# EAGLE board OpenBlink (EAGLE 6.3)
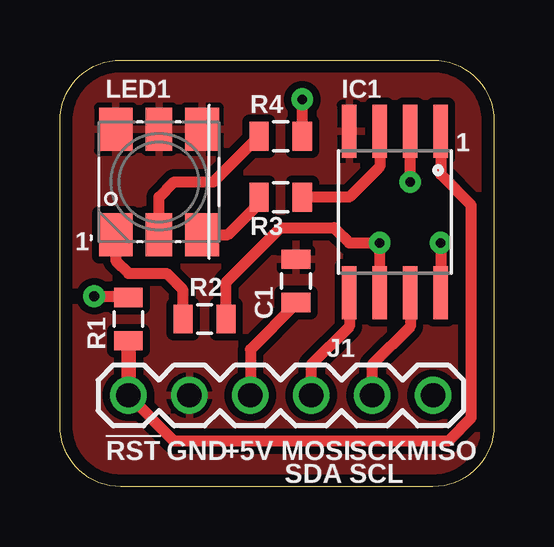
[diagram p0: board, top side]
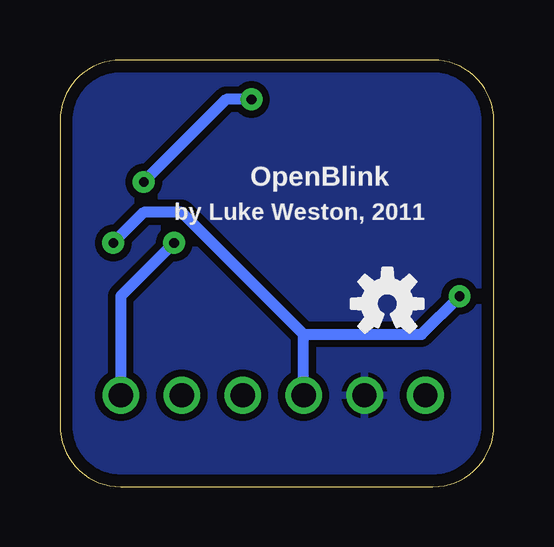
[diagram p1: board, bottom side, seen from below]

Size 18.1 x 17.78 mm. Coordinates in mm from the lower left corner, seen from the top.
Outline: 2.54,0 arc-90 0,2.54 0,15.24 arc-90 2.54,17.78 15.56,17.78 arc-90 18.1,15.24 18.1,2.54 arc-90 15.56,0 2.54,0
Copper layers (1*16): Top 0.035mm / dielectric 1.5mm / Bottom 0.035mm
Design rules "PCBCart-Standard *": minimum track width 8mil, minimum drill 0.4mm, track to track 8mil, track to pad 8mil, pad to pad 8mil, via to via 8mil, smd to smd 8mil, copper to edge 20mil, drill to drill 8mil, minimum pad ring 8mil, minimum via ring 10mil, stop-mask expansion 3mil, vias tented up to drill 16mil, thermal gap 8mil

## Footprints (pad centres in the part's own frame; a part is rotated, then mirrored left to right if it is on the bottom)
0805 = smd 0.8 x 1.2: 1 -0.9,0; 2 0.9,0
SO08-EIAJ = smd 0.61 x 2.21: 1 -1.905,-3.378; 2 -0.635,-3.378; 3 0.635,-3.378; 4 1.905,-3.378; 5 1.905,3.353; 6 0.635,3.353; 7 -0.635,3.353; 8 -1.905,3.353
1X06 = drill 1.016: 1 0,0; 2 2.54,0; 3 5.08,0; 4 7.62,0; 5 10.16,0; 6 12.7,0
LED-RGB-5050 = smd 1.8 x 1.4: BA -2.2,1.8; BK 2.2,1.8; GA -2.2,-1.8; GK 2.2,-1.8 | smd 1.8 x 1.1: RA -2.2,0; RK 2.2,0

## Placement (x,y rotation side)
C1  100nF  [0805]  9.84,8.57 90 top
IC1  ATtiny85  [SO08-EIAJ]  13.97,11.43 180 top
J1  Interface  [1X06]  2.86,3.81 0 top
LED1  RGB LED  [LED-RGB-5050]  4.13,12.7 90 top
R1  10kΩ  [0805]  2.86,6.99 90 top
R2  100Ω  [0805]  6.03,6.99 0 top
R3  100Ω  [0805]  9.21,12.06 0 top
R4  220Ω  [0805]  9.21,14.6 0 top
SY  OSHW-LOGOS  [OSHW-LOGO-S]  4.45,7.62 0 bottom

## Library data of the parts
C1 R1-R4 = freetronics-master-v1; PACKAGE: 0805
IC1 = SparkFun; PACKAGE: 8-SOIC
J1 = freetronics-master-v1
LED1 = freetronics-master-v1; PACKAGE: 5050
SY = SparkFun

## Nets
!RESET: IC1.1 J1.1 R1.1
+5V: C1.1 IC1.8 J1.3 R1.2
GND: C1.2 IC1.4 J1.2 LED1.BK LED1.GK LED1.RK
MISO: IC1.6 J1.6 R2.2
MOSI/SDA: IC1.5 J1.4
N$2: IC1.2 R4.2
N$3: IC1.3 R3.2
N$4: LED1.RA R4.1
N$5: LED1.GA R3.1
N$6: LED1.BA R2.1
SCK/SCL: IC1.7 J1.5

## Tracks (layer width: path | path; a pad name or v marks a point on that pad's centre or on a via)
!RESET
  Top 0.457: IC1.1 15.87,13.02 17.14,11.75 17.14,2.86 16.19,1.91 4.76,1.91 J1.1
  Top 0.61: R1.1 J1.1
+5V  (via drill 0.4)
  Top 0.457: C1.1 9.84,7.62 7.94,5.71 J1.3 | v15.87,10.16 IC1.8 | v1.43,7.94 2.81,7.94 R1.2
  Bottom 0.457: J1.3 7.94,6.35 | 7.94,6.35 13.02,11.43 14.6,11.43 v15.87,10.16 | 7.94,6.35 3.02,6.35 v1.43,7.94
GND
  pour Top (isolate 0.305): -0.32,-0.32 -0.32,18.1 18.42,18.1 18.42,-0.32
  pour Bottom (isolate 0.305): -0.32,-0.32 -0.32,18.1 18.42,18.1 18.42,-0.32
MISO  (via drill 0.4)
  Top 0.457: IC1.6 v13.33,10.16 12.07,10.16 11.43,10.8 9.21,10.8 6.93,8.52 R2.2
  Bottom 0.457: v13.33,10.16 15.56,7.94 J1.6
MOSI/SDA
  Top 0.457: IC1.5 12.07,6.67 10.48,5.08 J1.4
N$2  (via drill 0.4)
  Top 0.457: R4.2 v10.11,16.14 | v14.6,12.7 IC1.2
  Bottom 0.457: v10.11,16.14 11.16,16.14 v14.6,12.7
N$3
  Top 0.457: IC1.3 13.33,13.33 12.07,12.07 R3.2
N$4
  Top 0.457: LED1.RA 4.13,12.07 4.76,12.7 6.4,12.7 R4.1
N$5
  Top 0.457: LED1.GA 7.01,10.5 8.25,11.75 8.25,12.01 R3.1
N$6
  Top 0.457: LED1.BA 2.33,9.42 2.86,8.89 4.45,8.89 5.13,8.2 R2.1
SCK/SCL
  Top 0.457: IC1.7 14.6,6.67 13.02,5.08 J1.5

## Text on the board
tPlace: 1 | 1 | !RST | GND | +5V | MOSI | SCK | MISO | SDA | SCL
bPlace: OpenBlink | by Luke Weston, 2011